# EAGLE board Transistor_ckt (EAGLE 9.6.2)
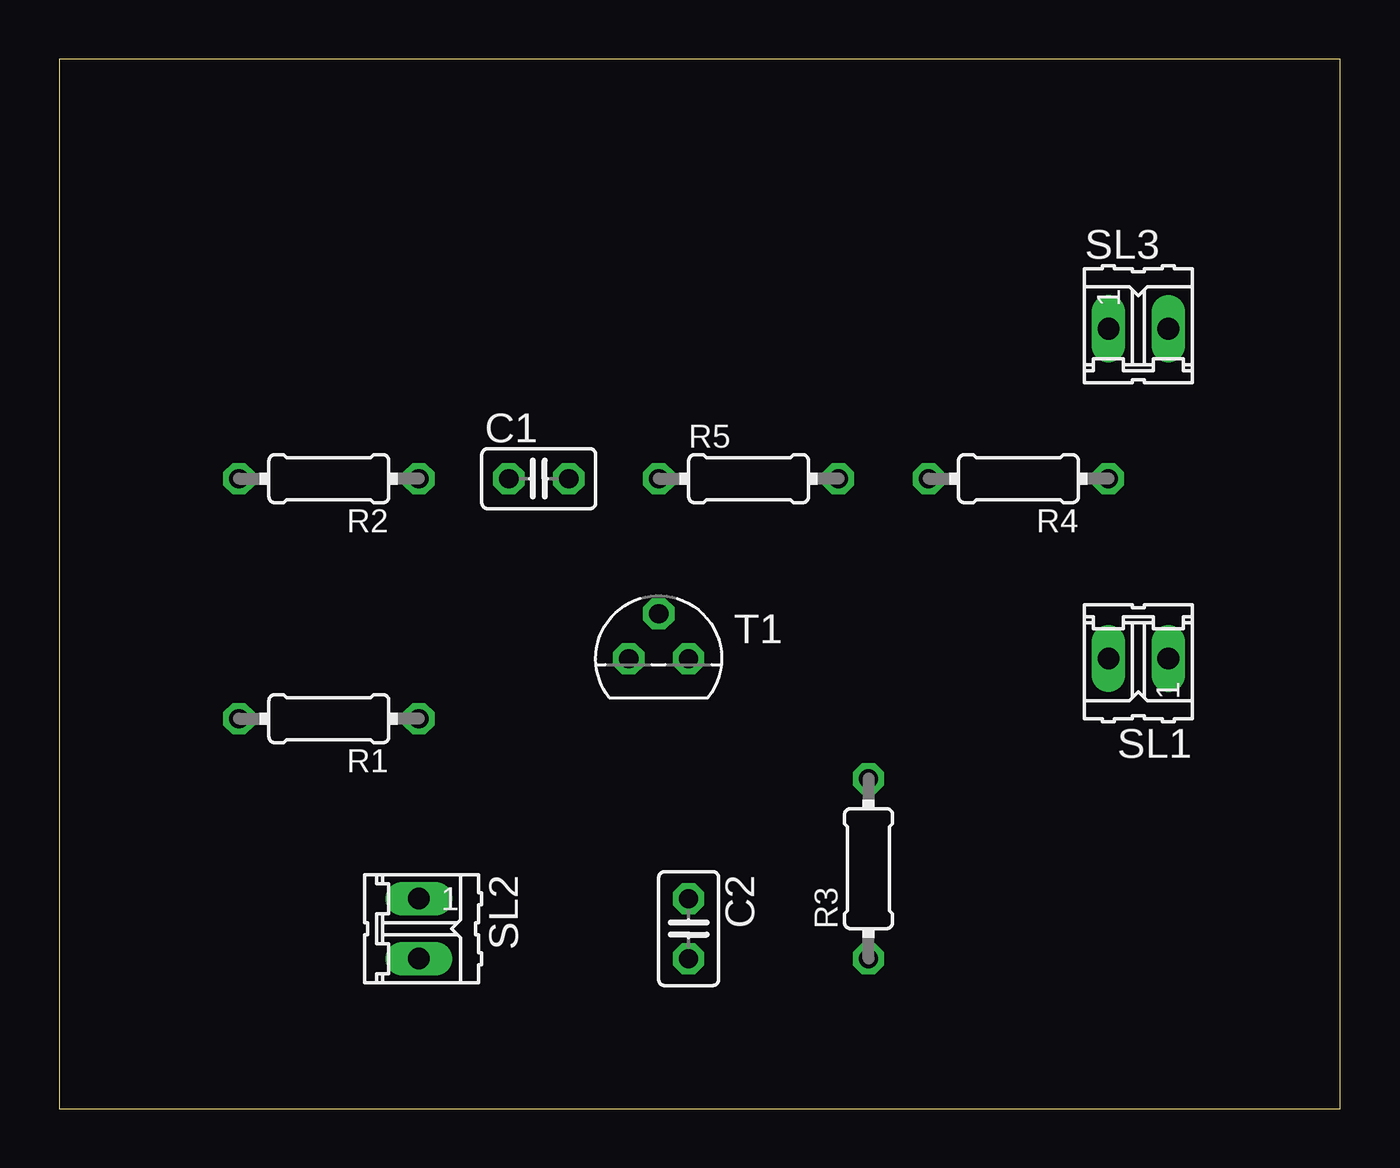
[diagram p0: board, top side]
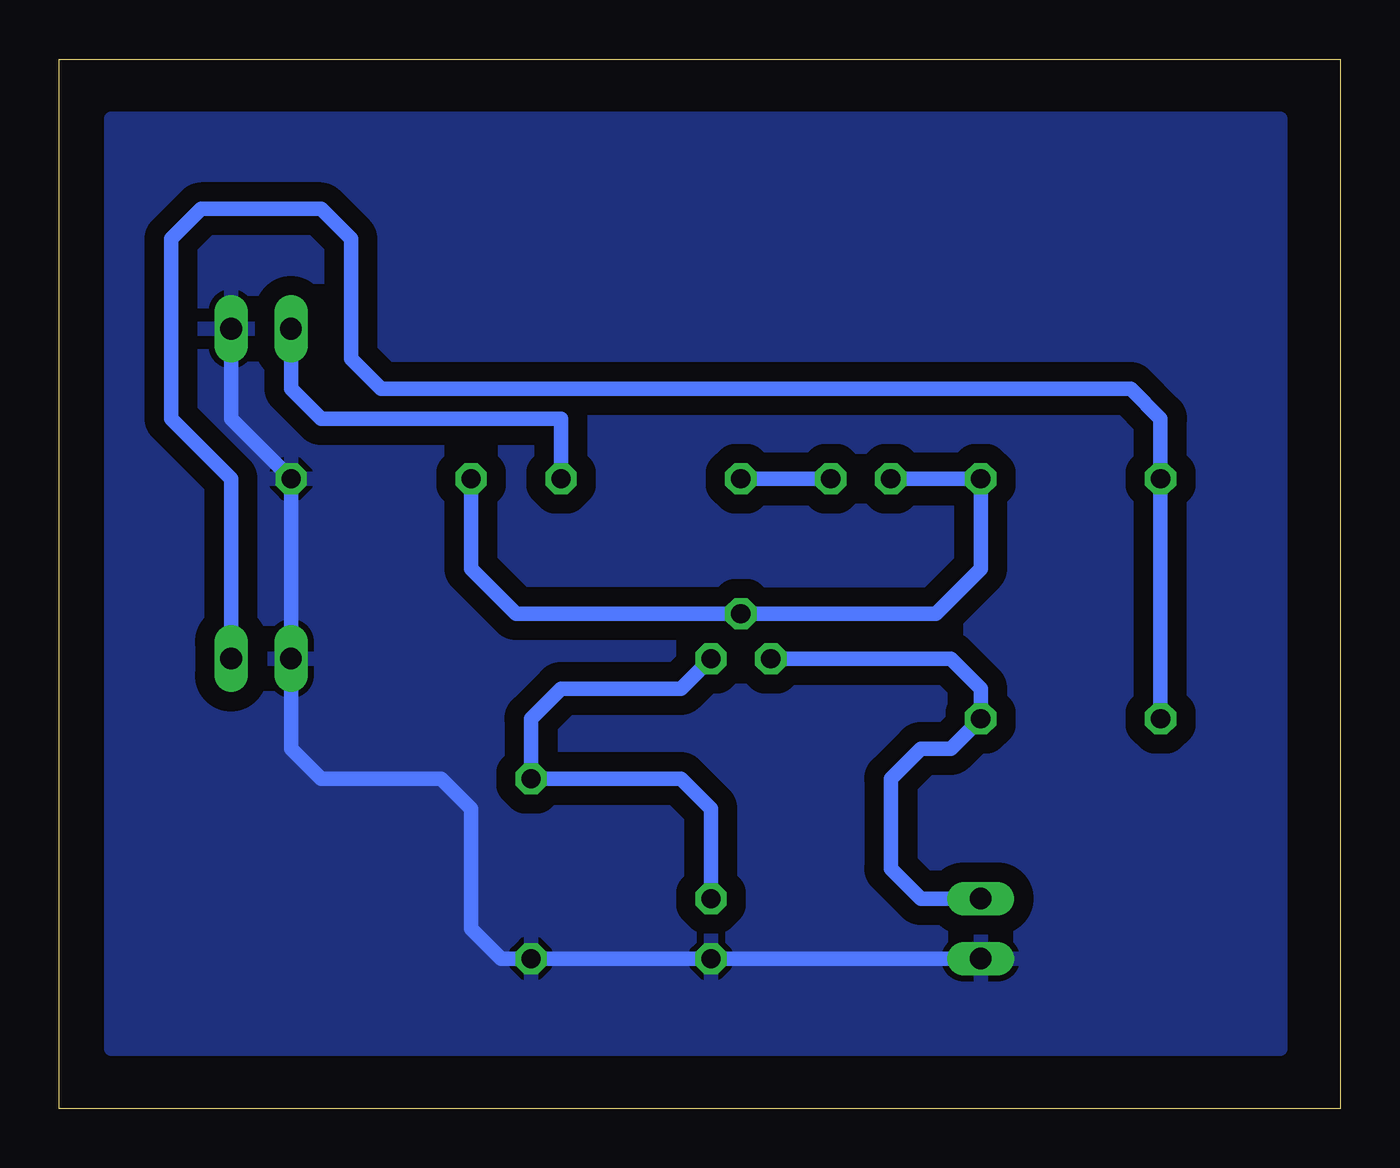
[diagram p1: board, bottom side, seen from below]

Size 54.28 x 44.44 mm. Coordinates in mm from the lower left corner, seen from the top.
Outline: 0,0 54.28,0 54.28,44.44 0,44.44 0,0
Copper layers (1*16): Top 0.035mm / dielectric 1.5mm / Bottom 0.035mm
Design rules "default": minimum track width 6mil, minimum drill 0.35mm, track to track 6mil, track to pad 6mil, pad to pad 6mil, via to via 6mil, smd to smd 6mil, copper to edge 40mil, drill to drill 6mil, minimum pad ring 10mil, minimum via ring 8mil, stop-mask expansion 4mil, vias tented up to drill 0mil, thermal gap 10mil

## Footprints (pad centres in the part's own frame; a part is rotated, then mirrored left to right if it is on the bottom)
C025-025X050 = drill 0.813 octagon: 1 -1.27,0; 2 1.27,0
0204/7 = drill 0.813 octagon: 1 -3.81,0; 2 3.81,0
02P = drill 0.914 long: 1 -1.27,0; 2 1.27,0
TO92 = drill 0.813 octagon: 1 1.27,0; 2 0,1.905; 3 -1.27,0

## Placement (x,y rotation side)
C1  100µ  [C025-025X050]  20.32,26.67 0 top
C2  100µ  [C025-025X050]  26.67,7.62 270 top
R1  1K  [0204/7]  11.43,16.51 180 top
R2  10K  [0204/7]  11.43,26.67 180 top
R3  470  [0204/7]  34.29,10.16 90 top
R4  10K  [0204/7]  40.64,26.67 180 top
R5  10K  [0204/7]  29.21,26.67 0 top
SL1  12V  [02P]  45.72,19.05 180 top
SL2  [02P]  15.24,7.62 270 top
SL3  5V  [02P]  45.72,33.02 0 top
T1  BC547  [TO92]  25.4,19.05 0 top

## Library data of the parts
C1 C2 = rcl; SPICEPREFIX: C
R1-R5 = rcl; SPICEPREFIX: R
SL1-SL3 = con-amp-quick; OC_FARNELL: unknown; OC_NEWARK: unknown
T1 = transistor

## Nets
GND: C2.2 R3.1 R4.1 SL1.2 SL2.2 SL3.2
N$1: R1.2 R2.2 SL1.1
N$2: R1.1 SL2.1 T1.3
N$3: C2.1 R3.2 T1.1
N$4: C1.2 R5.1
N$5: C1.1 R2.1 R4.2 T1.2
N$10: R5.2 SL3.1

## Tracks (layer width: path | path; a pad name or v marks a point on that pad's centre or on a via)
GND
  Bottom 0.61: SL3.2 46.99,29.21 R4.1 SL1.2 44.45,15.24 43.18,13.97 38.1,13.97 36.83,12.7 36.83,7.62 35.56,6.35 R3.1 C2.2 SL2.2
  pour Bottom (isolate 0.813): 3.81,41.91 52.07,41.91 52.07,2.54 2.54,2.54 2.54,41.91
N$1
  Bottom 0.61: SL1.1 46.99,26.67 49.53,29.21 49.53,36.83 48.26,38.1 43.18,38.1 41.91,36.83 41.91,31.75 40.64,30.48 8.89,30.48 7.62,29.21 R2.2 R1.2
N$2
  Bottom 0.61: SL2.1 17.78,8.89 19.05,10.16 19.05,13.97 17.78,15.24 16.51,15.24 R1.1 15.24,17.78 16.51,19.05 T1.3
N$3
  Bottom 0.61: T1.1 27.94,17.78 33.02,17.78 34.29,16.51 R3.2 27.94,13.97 26.67,12.7 C2.1
N$4
  Bottom 0.61: R5.1 C1.2
N$5
  Bottom 0.61: R4.2 36.83,22.86 34.92,20.95 T1.2 17.14,20.95 15.24,22.86 R2.1 C1.1
N$10
  Bottom 0.61: R5.2 33.02,29.21 43.18,29.21 44.45,30.48 SL3.1